# Altium PCB Orient.PcbDoc (part 4 of 4)
Units mil, origin at the board's own origin, x right, y up, seen from the top; angles counter-clockwise.
Board outline 3600 x 2400 mil, 4 copper layers (Top Layer, Layer 1, Layer 2, Bottom Layer), stack 23.756 mil thick; 365 components, 303 nets, 1656 pads, 303 vias.
Unrouted connection lines stored in the file: 1026.
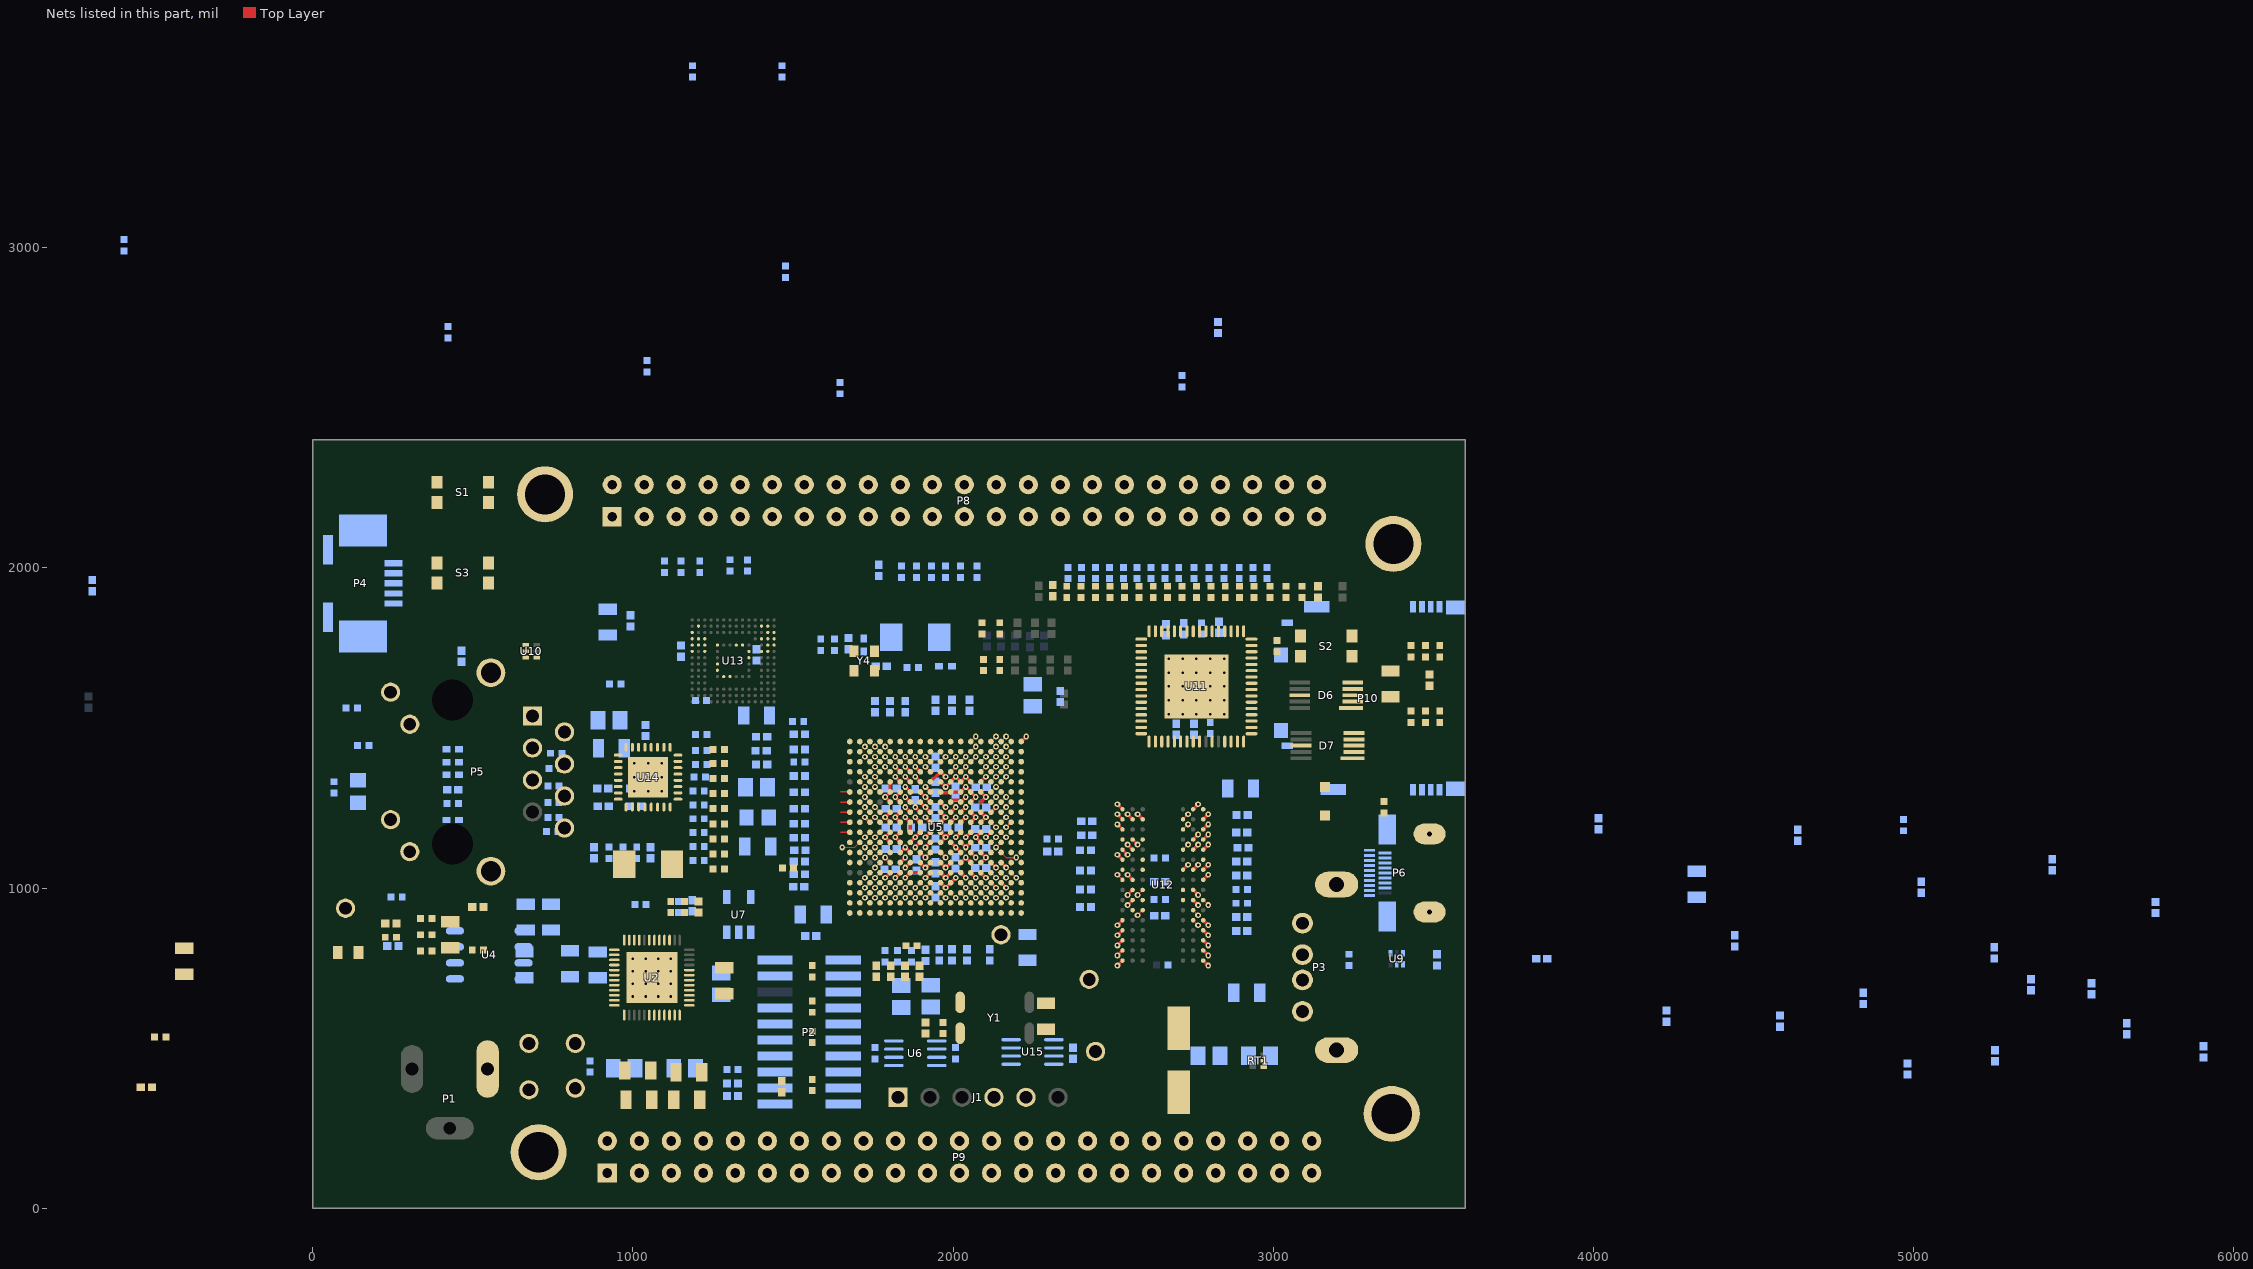
[diagram p4: the nets of this part, all layers, seen from the top]

## Part data (continued)
R97 R112 R113 R114 R119 R146 R147: library part RES_10k, "RES 1.50K OHM 1/16W 1% 0402 SMD", Manufacturer=Yageo, Manufacturer Part Number=RC0402FR-071K5L, Package / Case="0402 (1005 Metric)", Power (Watts)="0.063W, 1/16W", Resistance (Ohms)=1.5k, Supplier Device Package=0402, Supplier Part Number 1=311-1.50KLRDKR-ND, Temperature Coefficient=±100ppm/°C, Tolerance=±1%, Category=Resistors, ComponentLink1Description=http://www.yageo.com/documents/recent/PYu-RC0402_51_RoHS_L_6.pdf, ComponentLink1URL=http://www.yageo.com/documents/recent/PYu-RC0402_51_RoHS_L_6.pdf, Composition="Thick Film", Features=-, Height="0.016\" (0.40mm)", Number of Terminations=2, Packaging=Digi-Reel®, Pricing 1="1=0.1, 10=0.014, 25=0.0104, 100=0.0063, 250=0.0054, 500=0.00382, 1000=0.0027, 2500=0.00234, 5000=0.00203 (USD)", RoHS="RoHS Compliant", Size / Dimension="0.039\" L x 0.020\" W (1.00mm x 0.50mm)", Supplier 1=Digi-Key
  R97 R112 R113 R114: Stock 1=433921
  R119: Stock 1=465266
  R146 R147: Stock 1=434146
R99: library part RES_240, "RES 240 OHM 1/10W 5% 0402 SMD", Manufacturer=Yageo, Manufacturer Part Number=RC0402FR-07240RL, Package / Case="0402 (1005 Metric)", Power (Watts)="0.063W, 1/16W", Resistance (Ohms)=240, Supplier Device Package=0402, Supplier Part Number 1=311-240LRDKR-ND, Temperature Coefficient=±100ppm/°C, Tolerance=±1%, Category=Resistors, ComponentLink1Description=http://www.yageo.com/documents/recent/PYu-RC0402_51_RoHS_L_6.pdf, ComponentLink1URL=http://www.yageo.com/documents/recent/PYu-RC0402_51_RoHS_L_6.pdf, Composition="Thick Film", Features=-, Height="0.016\" (0.40mm)", Number of Terminations=2, Packaging=Digi-Reel®, Pricing 1="1=0.1, 10=0.014, 25=0.0104, 100=0.0063, 250=0.0054, 500=0.00382, 1000=0.0027, 2500=0.00234, 5000=0.00203 (USD)", RoHS="RoHS Compliant", Size / Dimension="0.039\" L x 0.020\" W (1.00mm x 0.50mm)", Stock 1=39100, Supplier 1=Digi-Key
R124: library part RES_10, "Resistor 10Kohm 1/16W 1% 0402", Manufacturer="Stackpole Electronics Inc", Manufacturer Part Number=RMCF0402FT10R0, Package / Case="0402 (1005 Metric)", Power (Watts)="0.063W, 1/16W", Resistance (Ohms)=10, Supplier Device Package=0402, Supplier Part Number 1=RMCF0402FT10R0DKR-ND, Temperature Coefficient=±100ppm/°C, Tolerance=±1%, Category=Resistors, ComponentLink1Description=http://www.seielect.com/Catalog/SEI-RMCF_RMCP.pdf, ComponentLink1URL=http://www.seielect.com/Catalog/SEI-RMCF_RMCP.pdf, Composition="Thick Film", Features=-, Height="0.016\" (0.40mm)", Number of Terminations=2, Packaging=Digi-Reel®, Pricing 1="1=0.04, 10=0.025, 50=0.0138, 100=0.0105, 250=0.0078, 500=0.00576, 1000=0.00384, 2500=0.00324, 5000=0.0027 (USD)", RoHS="RoHS Compliant", Size / Dimension="0.039\" L x 0.020\" W (1.00mm x 0.50mm)", Stock 1=41540, Supplier 1=Digi-Key
R125 R126 R129: library part RES_100, "RES 100 OHM 1/10W 5% 0402 SMD", Manufacturer="Panasonic Electronic Components", Manufacturer Part Number=ERJ-2RKF1000X, Package / Case="0402 (1005 Metric)", Power (Watts)="0.1W, 1/10W", Resistance (Ohms)=100, Supplier Device Package=0402, Supplier Part Number 1=P100LDKR-ND, Temperature Coefficient=±100ppm/°C, Category=Resistors, ComponentLink1Description=http://industrial.panasonic.com/www-cgi/jvcr13pz.cgi?E+PZ+3+AOA0002+ERJ2RKF1000X+7+WW, ComponentLink1URL=http://industrial.panasonic.com/www-cgi/jvcr13pz.cgi?E+PZ+3+AOA0002+ERJ2RKF1000X+7+WW, Composition="Thick Film", Features=-, Height="0.016\" (0.40mm)", Number of Terminations=2, Packaging=Digi-Reel®, PART#="Rohm MCR03EZPFX1000", Pricing 1="1=0.1, 50=0.0242, 100=0.0184, 250=0.01364, 500=0.01008, 1000=0.00672, 5000=0.00473 (USD)", RoHS=RoHS, Size / Dimension="0.039\" L x 0.020\" W (1.00mm x 0.50mm)", Stock 1=2375521, Supplier 1=Digi-Key
R127 R128 R131 R133 R139: library part RES_100, "RES 100 OHM 1/10W 5% 0402 SMD", Manufacturer="Panasonic Electronic Components", Manufacturer Part Number=ERJ-2RKF1000X, Package / Case="0402 (1005 Metric)", Power (Watts)="0.1W, 1/10W", Resistance (Ohms)=100, Supplier Device Package=0402, Supplier Part Number 1=P100LDKR-ND, Temperature Coefficient=±100ppm/°C, Tolerance=±1%, Category=Resistors, ComponentLink1Description=http://industrial.panasonic.com/www-cgi/jvcr13pz.cgi?E+PZ+3+AOA0002+ERJ2RKF1000X+7+WW, ComponentLink1URL=http://industrial.panasonic.com/www-cgi/jvcr13pz.cgi?E+PZ+3+AOA0002+ERJ2RKF1000X+7+WW, Composition="Thick Film", Features=-, Height="0.016\" (0.40mm)", Number of Terminations=2, Packaging=Digi-Reel®, Pricing 1="1=0.1, 50=0.0242, 100=0.0184, 250=0.01364, 500=0.01008, 1000=0.00672, 5000=0.00473 (USD)", RoHS="RoHS Compliant", Size / Dimension="0.039\" L x 0.020\" W (1.00mm x 0.50mm)", Stock 1=2375521, Supplier 1=Digi-Key
R130 R132: library part RES_470, "RES 470 OHM 1/10W 5% 0402 SMD", Manufacturer="Panasonic Electronic Components", Manufacturer Part Number=ERJ-2GEJ471X, Package / Case="0402 (1005 Metric)", Power (Watts)="0.1W, 1/10W", Resistance (Ohms)=470, Supplier Device Package=0402, Supplier Part Number 1=P470JDKR-ND, Temperature Coefficient=±200ppm/°C, Tolerance=±5%, Category=Resistors, ComponentLink1Description=http://industrial.panasonic.com/www-cgi/jvcr13pz.cgi?E+PZ+3+AOA0001+ERJ2GEJ471X+7+WW, ComponentLink1URL=http://industrial.panasonic.com/www-cgi/jvcr13pz.cgi?E+PZ+3+AOA0001+ERJ2GEJ471X+7+WW, Composition="Thick Film", Features=-, Height="0.016\" (0.40mm)", Number of Terminations=2, Packaging=Digi-Reel®, Pricing 1="1=0.1, 50=0.0172, 100=0.0131, 250=0.00976, 500=0.0072, 1000=0.0048, 5000=0.00338 (USD)", RoHS="RoHS Compliant", Size / Dimension="0.039\" L x 0.020\" W (1.00mm x 0.50mm)", Stock 1=563344, Supplier 1=Digi-Key
R134 R138: library part RES_100, "RES 100 OHM 1/10W 5% 0402 SMD", Manufacturer="Panasonic Electronic Components", Manufacturer Part Number=ERJ-2RKF1000X, Package / Case="0402 (1005 Metric)", Power (Watts)="0.1W, 1/10W", Resistance (Ohms)=100, Supplier Device Package=0402, Supplier Part Number 1=P100LDKR-ND, Temperature Coefficient=±100ppm/°C, Tolerance=1%, Category=Resistors, ComponentLink1Description=http://industrial.panasonic.com/www-cgi/jvcr13pz.cgi?E+PZ+3+AOA0002+ERJ2RKF1000X+7+WW, ComponentLink1URL=http://industrial.panasonic.com/www-cgi/jvcr13pz.cgi?E+PZ+3+AOA0002+ERJ2RKF1000X+7+WW, Composition="Thick Film", Features=-, Height="0.016\" (0.40mm)", Number of Terminations=2, Packaging=Digi-Reel®, PART#="Rohm MCR03EZPFX1000", Pricing 1="1=0.1, 50=0.0242, 100=0.0184, 250=0.01364, 500=0.01008, 1000=0.00672, 5000=0.00473 (USD)", RoHS=RoHS, Size / Dimension="0.039\" L x 0.020\" W (1.00mm x 0.50mm)", Stock 1=2375521, Supplier 1=Digi-Key, Wattage=1/10W
R136: library part RES_0.1_0805, "RES .10 OHM 1/8W 5% 0805", Manufacturer="CTS Resistor Products", Manufacturer Part Number=73L3R10J, Package / Case="0805 (2012 Metric)", Power (Watts)="0.125W, 1/8W", Resistance (Ohms)=0.1, Supplier Device Package=0805, Supplier Part Number 1=73L3R10JDKR-ND, Temperature Coefficient=±200ppm/°C, Tolerance=±5%, Category=Resistors, ComponentLink1Description=http://www.ctscorp.com/components/Datasheets/008-0337-0.pdf, ComponentLink1URL=http://www.ctscorp.com/components/Datasheets/008-0337-0.pdf, Composition="Thick Film", Features="Current Sense", Height="0.026\" (0.65mm)", Number of Terminations=2, Packaging=Digi-Reel®, Pricing 1="1=0.1, 10=0.066, 100=0.0267, 250=0.0204, 500=0.01632, 1000=0.01201 (USD)", RoHS="RoHS Compliant", Size / Dimension="0.079\" L x 0.049\" W (2.00mm x 1.25mm)", Stock 1=37057, Supplier 1=Digi-Key
R137 R140 R142 R149: library part RES_0, "RES 0.0 OHM 1/16W 0402 SMD", Manufacturer=Yageo, Manufacturer Part Number=RC0402JR-070RL, Package / Case="0402 (1005 Metric)", Power (Watts)="0.063W, 1/16W", Resistance (Ohms)=0.0, Supplier Device Package=0402, Supplier Part Number 1=311-0.0JRDKR-ND, Temperature Coefficient=-, Tolerance=Jumper, Category=Resistors, ComponentLink1Description=http://www.yageo.com/documents/recent/PYu-RC0402_51_RoHS_L_6.pdf, ComponentLink1URL=http://www.yageo.com/documents/recent/PYu-RC0402_51_RoHS_L_6.pdf, Composition="Thick Film", Features=-, Height="0.016\" (0.40mm)", Number of Terminations=2, Packaging=Digi-Reel®, Pricing 1="1=0.1, 10=0.012, 25=0.0092, 100=0.0055, 250=0.00476, 500=0.00336, 1000=0.00237, 2500=0.00206, 5000=0.00178 (USD)", RoHS="RoHS Compliant", Size / Dimension="0.039\" L x 0.020\" W (1.00mm x 0.50mm)", Supplier 1=Digi-Key
  R137 R140 R142: Stock 1=4904429
  R149: Stock 1=4565215
R141: library part RES_1M, "RES 1M OHM 1/16W 1% 0402 SMD", Manufacturer="Stackpole Electronics Inc", Manufacturer Part Number=RMCF0402FT1M00, Package / Case="0402 (1005 Metric)", Power (Watts)="0.063W, 1/16W", Resistance (Ohms)=1M, Supplier Device Package=0402, Supplier Part Number 1=RMCF0402FT1M00DKR-ND, Temperature Coefficient=±100ppm/°C, Tolerance=±1%, Category=Resistors, ComponentLink1Description=http://www.seielect.com/Catalog/SEI-RMCF_RMCP.pdf, ComponentLink1URL=http://www.seielect.com/Catalog/SEI-RMCF_RMCP.pdf, Composition="Thick Film", Features=-, Height="0.016\" (0.40mm)", Number of Terminations=2, Packaging=Digi-Reel®, Pricing 1="1=0.04, 10=0.025, 50=0.0138, 100=0.0105, 250=0.0078, 500=0.00576, 1000=0.00384, 2500=0.00324, 5000=0.0027 (USD)", RoHS="RoHS Compliant", Size / Dimension="0.039\" L x 0.020\" W (1.00mm x 0.50mm)", Stock 1=175650, Supplier 1=Digi-Key
R143: library part RES_10, "RES 10 OHM 1/16W 1% 0402 SMD", Manufacturer="Stackpole Electronics Inc", Manufacturer Part Number=RMCF0402FT10R0, Package / Case="0402 (1005 Metric)", Power (Watts)="0.063W, 1/16W", Resistance (Ohms)=10, Supplier Device Package=0402, Supplier Part Number 1=RMCF0402FT10R0DKR-ND, Temperature Coefficient=±100ppm/°C, Tolerance=±1%, Category=Resistors, ComponentLink1Description=http://www.seielect.com/Catalog/SEI-RMCF_RMCP.pdf, ComponentLink1URL=http://www.seielect.com/Catalog/SEI-RMCF_RMCP.pdf, Composition="Thick Film", Features=-, Height="0.016\" (0.40mm)", Number of Terminations=2, Packaging=Digi-Reel®, Pricing 1="1=0.04, 10=0.025, 50=0.0138, 100=0.0105, 250=0.0078, 500=0.00576, 1000=0.00384, 2500=0.00324, 5000=0.0027 (USD)", RoHS="RoHS Compliant", Size / Dimension="0.039\" L x 0.020\" W (1.00mm x 0.50mm)", Stock 1=41540, Supplier 1=Digi-Key
R144: library part RES_12.1k, "RES 12.1K OHM 1/16W 1% 0402 SMD", Manufacturer=Yageo, Manufacturer Part Number=RC0402FR-0712K1L, Package / Case="0402 (1005 Metric)", Power (Watts)="0.063W, 1/16W", Resistance (Ohms)=12.1k, Supplier Device Package=0402, Supplier Part Number 1=311-12.1KLRDKR-ND, Temperature Coefficient=±100ppm/°C, Tolerance=±1%, Category=Resistors, ComponentLink1Description=http://www.yageo.com/documents/recent/PYu-RC0402_51_RoHS_L_6.pdf, ComponentLink1URL=http://www.yageo.com/documents/recent/PYu-RC0402_51_RoHS_L_6.pdf, Composition="Thick Film", Features=-, Height="0.016\" (0.40mm)", Number of Terminations=2, Packaging=Digi-Reel®, Pricing 1="1=0.1, 10=0.014, 25=0.0104, 100=0.0063, 250=0.0054, 500=0.00382, 1000=0.0027, 2500=0.00234, 5000=0.00203 (USD)", RoHS="RoHS Compliant", Size / Dimension="0.039\" L x 0.020\" W (1.00mm x 0.50mm)", Stock 1=320170, Supplier 1=Digi-Key
R166: library part RES_27k, "RES 27.0K OHM 1/16W 1% 0402 SMD", Manufacturer=Yageo, Manufacturer Part Number=RC0402FR-0727KL, Package / Case="0402 (1005 Metric)", Power (Watts)="0.063W, 1/16W", Resistance (Ohms)=27k, Supplier Device Package=0402, Supplier Part Number 1=311-27.0KLRDKR-ND, Temperature Coefficient=±100ppm/°C, Tolerance=±1%, Category=Resistors, ComponentLink1Description=http://www.yageo.com/documents/recent/PYu-RC0402_51_RoHS_L_6.pdf, ComponentLink1URL=http://www.yageo.com/documents/recent/PYu-RC0402_51_RoHS_L_6.pdf, Composition="Thick Film", Features=-, Height="0.016\" (0.40mm)", Number of Terminations=2, Packaging=Digi-Reel®, Pricing 1="1=0.1, 10=0.014, 25=0.0104, 100=0.0063, 250=0.0054, 500=0.00382, 1000=0.0027, 2500=0.00234, 5000=0.00203 (USD)", RoHS="RoHS Compliant", Size / Dimension="0.039\" L x 0.020\" W (1.00mm x 0.50mm)", Stock 1=115508, Supplier 1=Digi-Key
R167: library part RES_33_0402, "RES 33 OHM 1/16W 5% 0402 SMD", Manufacturer="Panasonic Electronic Components", Manufacturer Part Number=ERJ-2GEJ330X, Package / Case="0402 (1005 Metric)", Power (Watts)="0.1W, 1/10W", Resistance (Ohms)=33, Supplier Device Package=0402, Supplier Part Number 1=P33JDKR-ND, Temperature Coefficient=±200ppm/°C, Tolerance=±5%, Category=Resistors, ComponentLink1Description=http://industrial.panasonic.com/www-cgi/jvcr13pz.cgi?E+PZ+3+AOA0001+ERJ2GEJ330X+7+WW, ComponentLink1URL=http://industrial.panasonic.com/www-cgi/jvcr13pz.cgi?E+PZ+3+AOA0001+ERJ2GEJ330X+7+WW, Composition="Thick Film", Features=-, Height="0.016\" (0.40mm)", Number of Terminations=2, Packaging=Digi-Reel®, Pricing 1="1=0.1, 50=0.0172, 100=0.0131, 250=0.00976, 500=0.0072, 1000=0.0048, 5000=0.00338 (USD)", RoHS="RoHS Compliant", Size / Dimension="0.039\" L x 0.020\" W (1.00mm x 0.50mm)", Stock 1=5879945, Supplier 1=Digi-Key
RT1: library part PROT_TPD4S012, "POLYSWITCH PTC RESET 0.1A", Current - Hold (Ih) (Max)=100mA, Current - Max=40A, Current - Trip (It)=200mA, Manufacturer="TE Connectivity", Manufacturer Part Number=RXEF010, Package / Case="Radial, Disc", Supplier Part Number 1=RXEF010-ND, Voltage - Max=60V, Category="Circuit Protection", ComponentLink1Description=http://documents.tycoelectronics.com/commerce/DocumentDelivery/DDEController?Action=showdoc&DocId=Specification+Or+Standard%7FSCD25213%7FE%7Fpdf%7FEnglish%7FENG_SS_SCD25213_E.pdf, ComponentLink1URL=http://documents.tycoelectronics.com/commerce/DocumentDelivery/DDEController?Action=showdoc&DocId=Specification+Or+Standard%7FSCD25213%7FE%7Fpdf%7FEnglish%7FENG_SS_SCD25213_E.pdf, Packaging=Bulk, Pricing 1="1=0.32, 10=0.289, 100=0.2625, 500=0.20476, 1000=0.1764, 5000=0.1617, 10000=0.1365, 50000=0.13125, 100000=0.126 (USD)", R Min/Max="2.500 ~ 4.500 Ohm", RoHS="RoHS Compliant", Stock 1=22325, Supplier 1=Digi-Key, Time to Trip=4s
S1 S2 S3: library part KMR2, "Microminiature Tact Switch for SMT", Contact Rating @ Voltage="0.05A @ 32VDC", Illumination Type, Color=-, Manufacturer="C&K Components", Operating Force=300gf, Operating Temperature="-40°C ~ 85°C", Supplier Part Number 1=401-1429-6-ND, Actuator Height off PCB, from Pins=1.90mm, Actuator Material=-, Actuator Orientation="Top Actuated", Actuator Type=Standard, Category=Switches, Circuit=SPST-NO, ComponentLink1Description=http://www.ck-components.com/index.php?module=media&action=Display&cmpref=14414&lang=en&width=&height=&format=&alt=, ComponentLink1URL=http://www.ck-components.com/index.php?module=media&action=Display&cmpref=14414&lang=en&width=&height=&format=&alt=, Features="Grounding Pin", Illumination=Non-Illuminated, Illumination Voltage (Nominal)=-, Ingress Protection=-, Manufacturer Part Number=KMR231GLFS, Mechanical Life="150,000 Cycles", Mounting Type="Surface Mount", Outline="4.60mm x 2.80mm", Packaging=Digi-Reel®, Pricing 1="1=0.44, 10=0.416, 25=0.3744, 50=0.3326, 100=0.3188, 250=0.29108, 500=0.2772, 1000=0.22869 (USD)", RoHS="RoHS Compliant", Stock 1=32289, Supplier 1=Digi-Key, Switch Function=Off-Mom, Switch Travel=0.25mm, Termination Style="Gull Wing"
U2: "IC PMIC BATT PWR SYST 48VQFN", Current - Supply=-, Manufacturer="Texas Instruments", Manufacturer Part Number=TPS65217CRSLR, Operating Temperature="-40°C ~ 105°C", Package / Case="48-VFQFN Exposed Pad", Supplier Device Package="48-VQFN-EP (6x6)", Supplier Part Number 1=296-34814-6-ND, Voltage - Supply="2.75 V ~ 5.8 V", Applications="Battery Management, Display (LED Drivers), Handheld/Mobile Devices, Power Supply", Category="Integrated Circuits (ICs)", ComponentLink1Description=Datasheet, ComponentLink1URL=http://www.ti.com/lit/ds/slvsb64i/slvsb64i.pdf, Mounting Type="Surface Mount", Packaging=Digi-Reel®, Pricing 1="1=8.01, 10=7.204, 25=6.5516, 100=4.1918, 250=4.11412, 500=4.0365, 750=3.95888 (USD)", RoHS="RoHS Compliant", Stock 1=0, Supplier 1=Digi-Key
U4: "LDO Voltage Regulator", Current - Limit (Min)=-, Current - Output="500mA (Max)", Manufacturer="Texas Instruments", Manufacturer Part Number=TL5209DR, Operating Temperature="-40°C ~ 125°C", Package / Case="8-SOIC (0.154\", 3.90mm Width)", Supplier Device Package=8-SOIC, Supplier Part Number 1=296-21569-6-ND, Voltage - Dropout (Typical)="0.35V @ 500mA", Voltage - Input="2.5 V ~ 16 V", Voltage - Output="2.5 V ~ 6.5 V", Category="Integrated Circuits (ICs)", ComponentLink1Description=http://media.digikey.com/pdf/Data%20Sheets/Texas%20Instruments%20PDFs/TL5209.pdf, ComponentLink1URL=http://media.digikey.com/pdf/Data%20Sheets/Texas%20Instruments%20PDFs/TL5209.pdf, Mounting Type="Surface Mount", Number of Regulators=1, Packaging=Digi-Reel®, Pricing 1="1=1.41, 10=1.244, 25=1.1232, 100=0.9828, 250=0.86192, 500=0.7644, 1000=0.6045 (USD)", Regulator Topology="Positive Adjustable", RoHS="RoHS Compliant", Stock 1=7190, Supplier 1=Digi-Key
U5: "SubArctic Cortex A8 Processor 15x15", Manufacturer="Texas Instruments", Manufacturer Part Number=XAM3359ZCZ, Package / Case=324-LFBGA, Supplier Device Package=324-NFBGA(15x15), Supplier Part Number 1=296-35073-ND, Voltage="1.06 V ~ 1.15 V", Category="Integrated Circuits (ICs)", ComponentLink1Description=http://www.ti.com/lit/ds/symlink/am3354.pdf, ComponentLink1URL=http://www.ti.com/lit/ds/symlink/am3354.pdf, Features=-, Mounting Type="Surface Mount", Packaging=Tray, Pricing 1="1=33.5, 10=30.988, 100=26.465, 250=24.28752, 500=23.115, 1000=21.775, 2500=21.105, 5000=20.6025, 10000=20.1 (USD)", Processor Type="ARM Microprocessor", RoHS="RoHS Compliant", Speed=-, Stock 1=16, Supplier 1=Digi-Key
U6: "SINGLE  POSITIVE-EDGE-TRIGGERED  D-TYPE  FLIP-FLOP WITH  CLEAR  AND  PRESET", Current - Output High, Low="32mA, 32mA", Frequency - Clock=200MHz, Manufacturer="Texas Instruments", Operating Temperature="-40°C ~ 125°C", Package / Case="8-LSSOP (0.11\", 2.80mm Width)", Supplier Part Number 1=296-25553-6-ND, Voltage - Supply="1.65 V ~ 5.5 V", Category="Integrated Circuits (ICs)", ComponentLink1Description=http://media.digikey.com/pdf/Data%20Sheets/Texas%20Instruments%20PDFs/SN74LVC1G74.pdf, ComponentLink1URL=http://media.digikey.com/pdf/Data%20Sheets/Texas%20Instruments%20PDFs/SN74LVC1G74.pdf, Delay Time - Propagation=1.6ns, Function="Set(Preset) and Reset", Manufacturer Part Number=SN74LVC1G74DCTR, Mounting Type="Surface Mount", Number of Bits per Element=1, Number of Elements=1, Output Type=Differential, Packaging=Digi-Reel®, Pricing 1="1=0.59, 10=0.494, 25=0.4332, 100=0.3708, 250=0.3216, 500=0.2724, 1000=0.21 (USD)", RoHS="RoHS Compliant", Stock 1=131, Supplier 1=Digi-Key, Trigger Type="Positive Edge", Type=D-Type
U7: "IC EEPROM 32KBIT 400KHZ SOT23-5", Manufacturer="Microchip Technology", Manufacturer Part Number=24LC32AT-I/OT, Operating Temperature="-40°C ~ 85°C", Package / Case="SC-74A, SOT-753", Supplier Device Package=SOT-23-5, Supplier Part Number 1=24LC32AT-I/OTDKR-ND, Voltage - Supply="2.5 V ~ 5.5 V", Category="Integrated Circuits (ICs)", ComponentLink1Description=http://ww1.microchip.com/downloads/en/DeviceDoc/21713M.pdf, ComponentLink1URL=http://ww1.microchip.com/downloads/en/DeviceDoc/21713M.pdf, Format - Memory="EEPROMs - Serial", Interface="I²C, 2-Wire Serial", Memory Size="32K (4K x 8)", Memory Type=EEPROM, Packaging=Digi-Reel®, Pricing 1="1=0.5, 10=0.32, 25=0.31, 100=0.3 (USD)", RoHS="RoHS Compliant", Speed=400kHz, Stock 1=8694, Supplier 1=Digi-Key
U9 U10: library part PROT_TPD4S012, "ESD 4channel USB Interface", Manufacturer="Texas Instruments", Manufacturer Part Number=TPD4S012DRYR, Mfr=TI, MfrNum=TPD4S012DRY, Package / Case=6-UFDFN, Power (Watts)=60W, Supplier Device Package="6-SON (1.45x1)", Supplier Part Number 1=296-24244-6-ND, TIIntPartnumber=1A0233, Voltage - Clamping=-, Applications=USB, Category="Circuit Protection", ComponentLink1Description=http://www.ti.com/lit/ds/symlink/tpd4s012.pdf, ComponentLink1URL=http://www.ti.com/lit/ds/symlink/tpd4s012.pdf, Cost10K=0.23, Cost100=0.76, Number of Circuits=4, Packaging=Digi-Reel®, PartName=TPD4S012, Pricing 1="1=0.78, 10=0.682, 25=0.6028, 100=0.2552, 250=0.25044, 500=0.2457, 750=0.24097 (USD)", RoHS="RoHS Compliant", Stock 1=7978, Supplier 1=Digi-Key, Technology="Mixed Technology", Vendor=Digikey, Voltage - Working=-
U11: "IC HDMI TRANSMITTER 64-HVQFN", Manufacturer="NXP Semiconductors", Manufacturer Part Number=TDA19988AHN/C1,551, Package / Case="64-VFQFN Exposed Pad", Supplier Device Package="64-HVQFN (9x9)", Supplier Part Number 1=TDA19988AHN/C1,551-ND, Applications="Set-Top Boxes", Category="Integrated Circuits (ICs)", ComponentLink1Description=Digikey, ComponentLink1URL=https://www.digikey.com/product-detail/en/nxp-usa-inc/TDA19988BHN-C1557/568-12059-ND/2780352, ComponentLink2Description=Datasheet, ComponentLink2URL=https://media.digikey.com/pdf/Data%20Sheets/NXP%20PDFs/TDA19988_DS_21_july_2011.pdf, Mounting Type="Surface Mount", Packaging=Tray, Pricing 1="260=4.59 (USD)", RoHS="RoHS Compliant", Stock 1=0, Supplier 1=Digi-Key, Type="HDMI Transmitter"
U12: library part MT41K256M16HA, "DDR2 SDRAM 2Gb (256Mx8)", Manufacturer="Micron Technology", Manufacturer Part Number=MT41K256M16HA-125:E, Package Quantity=1, Peak Solder Temperature="260 deg C", Supplier Part Number 1=52128708S9959891N2406, China ROHS Cadmium (X -> above / O -> below threshold)=O, China ROHS Hex Chromium (X -> above / O -> below threshold)=O, China ROHS Lead (X -> above / O -> below threshold)=O, China ROHS Mercury (X -> above / O -> below threshold)=O, China ROHS PBB (X -> above / O -> below threshold)=O, China ROHS PBDE (X -> above / O -> below threshold)=O, ComponentLink1Description=http://components.arrow.com/partservice/dataview/altium/52128708S9959891N2406?apiKey=aa438727d59eed98c4bed826d8d949c84cb5e685b92bf87346a0226bd2658797, ComponentLink1URL=http://components.arrow.com/partservice/dataview/altium/52128708S9959891N2406?apiKey=aa438727d59eed98c4bed826d8d949c84cb5e685b92bf87346a0226bd2658797, EU_ROHS_PROD_EXEMPTION_BY_SUPP=N/R, Lead Time="0 weeks", Pricing 1="0=10.09 (USD)", RoHS="CHINA ROHS: Compliant / EU ROHS: Compliant", Stock 1=0, Supplier 1=Arrow, Termination Finish=Sn/Ag/Cu
U13: library part IC_eMMC, "Flash Card 2G-byte 3.3V MultiMedia Card 153-Pin WFBGA", Manufacturer="Micron Technology", Manufacturer Part Number="MTFC2GMVEA-0M WT", Package Quantity=1, Supplier Part Number 1=53710993S251949N2406, ComponentLink1Description=http://components.arrow.com/partservice/dataview/altium/53710993S251949N2406?apiKey=aa438727d59eed98c4bed826d8d949c84cb5e685b92bf87346a0226bd2658797, ComponentLink1URL=http://components.arrow.com/partservice/dataview/altium/53710993S251949N2406?apiKey=aa438727d59eed98c4bed826d8d949c84cb5e685b92bf87346a0226bd2658797, EU_ROHS_PROD_EXEMPTION_BY_SUPP=N/R, Lead Time="2 weeks", Pricing 1="0=7.21 (USD)", RoHS="CHINA ROHS: Compliant / EU ROHS: Compliant", Stock 1=1009, Supplier 1=Arrow
U14: library part IC_Ethernet_XCVR, "Ethernet ICs 10/100 Ethernet XCVR w/HPAutoMDIX FlexPwr", Manufacturer="Microchip Technology", Manufacturer Part Number=LAN8710A-EZK-TR, Maximum Operating Temperature="+ 85 C", Minimum Operating Temperature="0 C", Package / Case=QFN-32, Supplier Part Number 1=886-LAN8710A-EZK-TR, Supply Voltage - Max="3.6 V", Supply Voltage - Min="1.6 V, 3 V", Category="Ethernet ICs", ComponentLink1Description=http://www.smsc.com/media/Downloads_Public/Data_Sheets/8710a.pdf, ComponentLink1URL=http://www.smsc.com/media/Downloads_Public/Data_Sheets/8710a.pdf, Data Rate="125 Mb/s", Minimum Order Quantity=1, Mounting Style=SMD/SMT, Number of Transceivers=1, Packaging=Reel, PART#="SMSC LAN8710A-EZK", Pricing 1="1=1.70, 10=1.47, 25=1.23, 100=1.11, 4000=1.11 (AUD)", Product="Ethernet Transceivers", Product Category="Ethernet Controllers", Reeling=True, RoHS="RoHS Compliant", RoHS - Mouser=Y, Standard Supported="802.3, 802.3u", Stock 1=12109, Supplier 1=Mouser, Type="Single Chip"
U15: "IC BUFF/DVR TRI-ST DL 8VSSOP", Current - Output High, Low="32mA, 32mA", Manufacturer="Texas Instruments", Manufacturer Part Number=SN74LVC2G241DCUR, Operating Temperature="-40°C ~ 85°C", Package / Case="8-VFSOP (0.091\", 2.30mm Width)", Supplier Device Package=US8, Supplier Part Number 1=296-11936-6-ND, Voltage - Supply="1.65 V ~ 5.5 V", Category="Integrated Circuits (ICs)", ComponentLink1Description=http://www.ti.com/lit/ds/symlink/sn74lvc2g241.pdf, ComponentLink1URL=http://www.ti.com/lit/ds/symlink/sn74lvc2g241.pdf, Logic Type="Buffer/Line Driver, Non-Inverting", Mounting Type="Surface Mount", Number of Bits per Element=1, Number of Elements=2, Packaging=Digi-Reel®, Pricing 1="1=0.49, 10=0.428, 25=0.3756 (USD)", RoHS="RoHS Compliant", Stock 1=28602, Supplier 1=Digi-Key
Y1: library part CRYS_32.768kHz, "CRYSTAL 32.768KHZ 12.5PF SMD", ESR (Equivalent Series Resistance)="50 kOhm", Frequency Stability=-, Frequency Tolerance=±30ppm, Load Capacitance=12.5pF, Manufacturer="Citizen Finetech Miyota", Manufacturer Part Number=CM200C-32.768KAZF-UT, Operating Mode=Fundamental, Operating Temperature="-40°C ~ 85°C", Package / Case="4-SOJ, 5.50mm pitch", Supplier Part Number 1=300-8738-6-ND, Category="Crystals and Oscillators", ComponentLink1Description=http://cfm.citizen.co.jp/english/product/pdf/CM200C_250C.pdf, ComponentLink1URL=http://cfm.citizen.co.jp/english/product/pdf/CM200C_250C.pdf, Frequency=32.768kHz, Height="0.098\" (2.50mm)", Mounting Type="Surface Mount", Packaging=Digi-Reel®, Pricing 1="1=0.75, 10=0.65, 50=0.57, 100=0.45, 500=0.38, 1000=0.3 (USD)", Ratings=-, RoHS="RoHS Compliant", Size / Dimension="0.311\" L x 0.146\" W (7.90mm x 3.70mm)", Stock 1=0, Supplier 1=Digi-Key, Type="kHz Crystal (Tuning Fork)"
Y2: library part CRYS_24MHz_SCC, "CRYSTAL 24.000MHZ 18PF SMD", ESR (Equivalent Series Resistance)="50 Ohm", Frequency Stability=±30ppm, Load Capacitance=18pF, Manufacturer="TXC CORPORATION", Manufacturer Part Number=7A-24.000MAAJ-T, Operating Mode=Fundamental, Operating Temperature="-20°C ~ 70°C", Package / Case=2-SMD, Ratings=-, Supplier Part Number 1=887-1090-6-ND, Category="Crystals and Oscillators", ComponentLink1Description=http://www.txccrystal.com/images/pdf/7a.pdf, ComponentLink1URL=http://www.txccrystal.com/images/pdf/7a.pdf, Frequency=24MHz, Frequency Tolerance=±30ppm, Height="0.053\" (1.35mm)", Mounting Type="Surface Mount", Packaging=Digi-Reel®, Pricing 1="1=0.79, 10=0.658, 50=0.59, 100=0.525, 500=0.5 (USD)", RoHS="RoHS Compliant", Size / Dimension="0.197\" L x 0.126\" W (5.00mm x 3.20mm)", Stock 1=2524, Supplier 1=Digi-Key, Type="MHz Crystal"
Y3: library part "Suntsu ITEMP 25MHz _0.005% 20pf", ESR (Equivalent Series Resistance)="50 Ohm", Frequency=25MHz, Frequency Stability=±50ppm, Frequency Tolerance=±20ppm, Load Capacitance=18pF, Manufacturer="Abracon Corporation", Manufacturer Part Number=ABM3-25.000MHZ-B2-T, Operating Mode=Fundamental, Operating Temperature="-20°C ~ 70°C", Package / Case=2-SMD, Ratings=-, Supplier Part Number 1=535-9108-6-ND, Category="Crystals and Oscillators", ComponentLink1Description=http://www.abracon.com/Resonators/abm3.pdf, ComponentLink1URL=http://www.abracon.com/Resonators/abm3.pdf, Height="0.051\" (1.30mm)", Mounting Type="Surface Mount", Packaging=Digi-Reel®, Pricing 1="1=1.43, 10=1.235, 50=1.083, 100=0.855, 500=0.722 (USD)", RoHS="RoHS Compliant", Size / Dimension="0.197\" L x 0.126\" W (5.00mm x 3.20mm)", Stock 1=23589, Supplier 1=Digi-Key, Type="MHz Crystal"
Y4: library part ASDMB, Current - Supply (Disable) (Max)=15µA, Current - Supply (Max)=16mA, Frequency Stability=±50ppm, Manufacturer="Abracon Corporation", Manufacturer Part Number=ASDMB-24.576MHZ-LC-T, Operating Temperature="-40°C ~ 85°C", Package / Case="4-SMD, No Lead (DFN, LCC)", Ratings=-, Supplier Part Number 1=535-11729-6-ND, Voltage - Supply="1.8 V ~ 3.3 V", Category="Crystals and Oscillators", ComponentLink1Description=http://www.abracon.com/Oscillators/ASDMB.pdf, ComponentLink1URL=http://www.abracon.com/Oscillators/ASDMB.pdf, Frequency=24.576MHz, Function="Standby (Power Down)", Height="0.035\" (0.90mm)", Mounting Type="Surface Mount", Output=CMOS, Packaging=Digi-Reel®, Pricing 1="1=1.69, 10=1.463, 50=1.2826, 100=1.0125, 500=0.855 (USD)", RoHS="RoHS Compliant", Size / Dimension="0.098\" L x 0.079\" W (2.50mm x 2.00mm)", Stock 1=0, Supplier 1=Digi-Key, Type="MEMS (Silicon)"

## Via types
v1: diameter 18, hole 8, Top Layer to Bottom Layer, tented both sides, 253 vias
v2: diameter 19.68, hole 7.87, Top Layer to Bottom Layer, 50 vias

## Nets (pads, with @x,y where several pads share a name; then routed paths per layer and width w, separated by ;. In a path a pad name is that pad's centre, name@x,y a point inside that pad or via, vN(x,y) a via of type N, cw(c..) or ccw(c..) an arc to the next point about the centre after c; other vN are vias at no path point)
12M_LOOP: U6.2 U6.3
12MHZ: R21.2 U11.27
AIN0: P9.39 U5.B6
AIN1: P9.40 U5.C7
  other v1: 2039.49,969.53
AIN2: P9.37 U5.B7
AIN3: P9.38 U5.A7
AIN4: P9.33 U5.C8
  other v1: 2007.99,969.53
AIN5: P9.36 U5.B8
AIN6: P9.35 U5.A8
AIN7: R163.2 R164.1 U5.C9
  other v1: 1976.5,969.53
B_UART0_RX: J1.4 R165.2 U15.2
B_UART0_TX: J1.5 U15.3
CAP_VBB_MPU: C91.1 U5.C10
  other v1: 1913.5,969.53
CAP_VDD_SRAM_CORE: C89.1 U5.D9
CAP_VDD_SRAM_MPU: C90.1 U5.D11
  other v1: 1882.01,1001.02
CLKOUT2: P2.18 P9.41 R19.2 R20.1
CLKOUT_SRC: R19.1 U5.D14
  other v1: 1787.52,1001.02
CRS: R139.2 U14.14
DDR_A0: U5.F3
  other v1: 2165.47,1064.02
DDR_A1: U5.H1
DDR_A2: U5.E4
  other v1: 2133.98,1032.52
DDR_A3: U5.C3
  other v1: 2165.47,969.53
DDR_A4: U5.C2
DDR_A5: U5.B1
DDR_A6: U5.D5
  other v1: 2102.48,1001.02
DDR_A7: U5.E2
  other v1: 2196.97,1032.52
DDR_A8: U5.D4
  other v1: 2133.98,1001.02
DDR_A9: U5.C1
DDR_A10: U5.F4
  other v1: 2133.98,1064.02
DDR_A11: U5.F2
DDR_A12: U5.E3
  other v1: 2165.47,1032.52
DDR_A13: U5.H3
  other v1: 2133.98,1127.01
DDR_A14: U5.H4
  other v1: 2133.98,1158.5
DDR_A15: U5.D3
  other v1: 2165.47,1001.02
DDR_BA0: U5.C4
  other v1: 2133.98,969.53
DDR_BA1: U5.E1
DDR_BA2: U5.B3
DDR_CASn: U5.F1 U12.K3
DDR_CKE: R96.2 U5.G3 U12.K9
  other v1: 2796.75,947 2196.97,1095.51
DDR_CLK: U5.D2 U12.J7
DDR_CLKn: U5.D1 U12.K7
DDR_CSn: U5.H2 U12.L2
DDR_D0: U5.M3
  other v1: 2165.47,1284.49
DDR_D1: U5.M4
  other v1: 2133.98,1284.49
DDR_D2: U5.N1
DDR_D3: U5.N2
DDR_D4: U5.N3
DDR_D5: U5.N4
  other v1: 2133.98,1315.98
DDR_D6: U5.P3
  other v1: 2165.47,1347.48
DDR_D7: U5.P4
  other v1: 2133.98,1347.48
DDR_D8: U5.J1
DDR_D9: U5.K1
DDR_D10: U5.K2
  other v1: 2165.47,1190
DDR_D11: U5.K3
  other v1: 2165.47,1221.5
DDR_D12: U5.K4
  other v1: 2133.98,1190
DDR_D13: U5.L3
  other v1: 2165.47,1252.99
DDR_D14: U5.L4
  other v1: 2133.98,1252.99
DDR_D15: U5.M1
DDR_DQM0: U5.M2 U12.E7
  other v1: 2733.75,1136
DDR_DQM1: U5.J2 U12.D3
DDR_DQS0: U5.P1 U12.F3
DDR_DQS1: U5.L1 U12.C7
  other v1: 2733.75,1199
DDR_DQSN0: U5.P2 U12.G3
DDR_DQSN1: U5.L2 U12.B7
  other v1: 2733.75,1230.5
DDR_ODT: U5.G1
DDR_RASn: U5.G4 U12.J3
  other v1: 2576.25,978.5
DDR_RESETn: U5.G2
DDR_VREF: C28.1 C123.1 C124.1 R98.2 R100.1 U5.J4 U12.H1 U12.M8
  other v1: 2765.25,884 2513.25,1041.5 2102.48,1158.5
DDR_VTP: R22.2 U5.J3
  other v1: 2165.47,1158.5
DDR_WEn: U5.B2 U12.L3
  other v1: 2576.25,915.5
DGND: C1.2 C2.2 C3.2 C4.2 C7.2 C8.2 C9.1 C10.2 C11.1 C12.1 C13.2 C14.1 C15.1 C16.1 C17.2 C18.1 C19.2 C20.2 C24.2 C27.2 C28.2 C29.2 C30.2 C35.2 C36.2 C37.2 C38.2 C39.1 C40.1 C41.2 C42.2 C43.2 C44.2 C45.2 C46.2 C47.2 C48.2 C49.2 C50.2 C51.2 C52.2 C53.2 C54.2 C55.1 C56.1 C57.1 C58.2 C59.2 C60.1 C61.1 C62.1 C63.2 C64.2 C65.2 C66.2 C67.2 C68.1 C69.1 C70.1 C71.1 C72.1 C73.1 C74.1 C75.1 C76.1 C77.2 C78.2 C79.2 C80.2 C81.2 C82.2 C83.2 C84.2 C85.2 C86.2 C87.2 C88.2 C89.2 C90.2 C91.2 C92.2 C94.2 C95.1 C96.1 C97.2 C98.2 C99.2 C100.2 C101.2 C102.2 C103.2 C104.2 C105.2 C106.2 C107.2 C108.2 C109.2 C110.2 C111.2 C112.2 C113.2 C114.2 C115.2 C116.2 C117.2 C118.1 C119.2 C120.2 C121.2 C122.1 C123.2 C124.2 C125.2 C126.1 C127.2 C128.2 C129.2 C130.2 C131.2 C132.2 C133.1 C134.2 C135.2 C136.2 C137.2 C138.2 C139.2 C140.2 C141.2 C142.2 C143.2 C144.2 C145.2 C146.2 C147.2 C148.2 C149.2 C150.2 C151.2 C152.2 C153.2 C154.2 C158.1 C159.2 D6.3 D6.8 D7.3 D7.8 FB3.2 J1.1 P2.4 P2.8 P2.10 P2.12 P2.16 P2.20 P3.4 P4.5 P5.8 P6.4 P6.7 P6.10 P6.13 P6.16 P8.1 P8.2 P9.1 P9.2 P9.43 P9.44 P9.45 P9.46 P10.6 P10.9 R10.1 R12.2 R22.1 R25.2 R49.1 R53.2 R54.1 R80.2 R81.2 R82.2 R83.2 R84.2 R85.2 R86.2 R87.2 R88.2 R89.2 R90.2 R91.2 R92.2 R93.2 R94.2 R95.2 R96.1 R99.1 R100.2 R115.2 R116.2 R117.2 R118.2 R130.1 R132.1 R135.2 R136.1 R144.2 R145.2 R148.2 R149.2 R164.2 R165.1 S1.1 S1.3 S2.2 S2.4 S3.1 S3.3 TP1.1 TP8.1 U2.30 U2.41 U2.49 U4.5 U4.6 U4.7 U4.8 U5.A1 U5.A18 U5.F8 U5.G8 U5.G9 U5.G11 U5.G12 U5.H6 U5.H7 U5.H8 U5.H9 U5.H10 U5.H12 U5.J6 U5.J7 U5.J8 U5.J9 U5.J10 U5.J11 U5.K7 U5.K9 U5.K10 U5.K11 U5.L10 U5.L11 U5.L12 U5.L13 U5.M6 U5.M7 U5.M8 U5.M9 U5.M10 U5.M12 U5.M14 U5.N7 U5.N10 U5.N11 U5.N14 U5.V1 U5.V18 U6.4 U7.2 U9.4 U10.4 U11.8 U11.9 U11.16 U11.17 U11.18 U11.19 U11.53 U11.54 U11.61 U11.62 U11.63 U11.65 U12.A9 U12.B1 U12.B3 U12.B9 U12.D1 U12.D8 U12.E1 U12.E2 U12.E8 U12.F9 U12.G1 U12.G8 U12.G9 U12.J2 U12.J8 U12.M1 U12.M9 U12.P1 U12.P9 U12.T1 U12.T9 U13.C4 U13.E7 U13.G5 U13.H10 U13.K8 U13.N2 U13.N5 U13.P4 U13.P6 U14.33 U15.4 Y4.2
  other v1: 2513.25,758 2796.75,758 2513.25,821 2796.75,821 2513.25,884 2796.75,884 2544.75,978.5 2765.25,978.5 1976.5,1064.02 2765.25,1073 2796.75,1073 1913.5,1095.51 1976.5,1095.51 2544.75,1104.5 1850.51,1127.01 1913.5,1127.01 2007.99,1127.01 2039.49,1127.01 2544.75,1136 2765.25,1136 1882.01,1158.5 1913.5,1158.5 1976.5,1158.5 2007.99,1158.5 2039.49,1158.5 2765.25,1167.5 1819.02,1221.5 1882.01,1221.5 1913.5,1221.5 2039.49,1221.5 2513.25,1230.5 2576.25,1230.5 2796.75,1230.5 1850.51,1252.99 1882.01,1252.99 1976.5,1252.99 1787.52,1284.49 1850.51,1284.49 1913.5,1284.49 2039.49,1284.49 2070.98,1284.49 1913.5,1315.98 2039.49,1315.98 2228.46,1473.46
  other v2: 1000,661.42 1039.37,661.42 1078.74,661.42 1118.11,661.42 1000,700.79 1039.37,700.79 1078.74,700.79 1118.11,700.79 1000,740.16 1039.37,740.16 1078.74,740.16 1118.11,740.16 1000,779.53 1039.37,779.53 1078.74,779.53 1118.11,779.53 1003.94,1303.15 1047.24,1303.15 1090.55,1303.15 1003.94,1346.46 1047.24,1346.46 1090.55,1346.46 1003.94,1389.76 1047.24,1389.76 1090.55,1389.76 2673.23,1543.31 2716.54,1543.31 2759.84,1543.31 2803.15,1543.31 2846.46,1543.31 2673.23,1586.61 2716.54,1586.61 2759.84,1586.61 2803.15,1586.61 2846.46,1586.61 2673.23,1629.92 2716.54,1629.92 2759.84,1629.92 2803.15,1629.92 2846.46,1629.92 2673.23,1673.23 2716.54,1673.23 2759.84,1673.23 2803.15,1673.23 2846.46,1673.23 2673.23,1716.54 2716.54,1716.54 2759.84,1716.54 2803.15,1716.54 2846.46,1716.54
DVI_+5V: P6.19 R146.1 R147.1 RT1.2
EHRPWM1A: P9.14 U5.U14
  other v1: 1787.52,1441.97
EHRPWM1B: P9.16 U5.T14
  other v1: 1787.52,1410.47
EHRPWM2A: P8.19 U5.U10
EHRPWM2B: P8.13 U5.T10
  other v1: 1913.5,1410.47
eMMC_RSTn: R111.2 R162.2 U13.K5
eMMC_VCCI: C125.1 U13.C2
ENZ_KALDO_1P8V: R54.2 U5.B4
ETH_TXD4: R145.1 U14.18
GND_EARTH: MTG1.1 MTG2.1 MTG3.1 MTG4.1 P3.5 P3.6 P4.6 P4.7 P4.8 P4.9 P5.13 P5.14 P6.20 P6.21 P6.22 P6.23 P10.11 P10.12 P10.13 P10.14 P10.15 P10.16 R136.2
GND_OSC0: C25.2 C26.2 U5.V11
GND_OSC1: C21.1 C22.1 U5.A5
GNDA_ADC: C31.2 C32.2 C33.2 C93.2 FB3.1 P9.34 U5.A9 U5.E8
GPIO0_7: P9.42 R50.2 R51.1
GPIO0_7SRC: R50.1 U5.C18
GPIO0_26: P8.14 U5.T11
  other v1: 1882.01,1410.47
GPIO0_27: P8.17 U5.U12
GPIO1_12: P8.12 U5.T12
  other v1: 1850.51,1410.47
GPIO1_13: P8.11 U5.R12
  other v1: 1850.51,1378.98
GPIO1_14: P8.16 U5.V13
GPIO1_15: P8.15 U5.U13
GPIO1_16: P9.15 R160.2 R161.2
GPIO1_17: P9.23 U5.V14
GPIO1_28: P9.12 U5.U18
GPIO1_29: P8.26 U5.V6
  other v1: 2070.98,1473.46
GPIO2_1: P8.18 U5.V12
GPIO3_18: R51.2 U5.B12
GPIO3_19: P9.27 U5.C13
  other v1: 1819.02,969.53
GPIO3_20: R20.2 U5.D13
  other v1: 1819.02,1001.02
GPIO3_21: P9.25 R167.2 U5.A14
GRN_C: P5.10 R132.2
GRNA: P5.9 U14.3
HDMI_1V8: C144.1 C145.1 C146.1 C147.1 C148.1 C149.1 C150.1 C151.1 FB5.1 U11.5 U11.14 U11.29 U11.35 U11.36 U11.41 U11.46 U11.47 U11.48 U11.55
HDMI_CEC: D8.1 P6.15 U11.30
HDMI_CEC_D: D8.2 R166.1
HDMI_DSCL: P6.17 R146.2 U11.33
HDMI_DSDA: P6.18 R147.2 U11.32
HDMI_HPD: P6.1 U11.31
HDMI_INT: R158.2 U5.U16 U11.50
  other v1: 1724.53,1441.97
HDMI_SWING: R148.1 U11.34
HDMI_TX0+: D6.2 P6.9 U11.40
HDMI_TX0-: D6.1 P6.11 U11.39
HDMI_TX1+: D7.5 P6.6 U11.43
HDMI_TX1-: D7.4 P6.8 U11.42
HDMI_TX2+: D7.2 P6.3 U11.45
HDMI_TX2-: D7.1 P6.5 U11.44
HDMI_TXC+: D6.4 P6.12 U11.38
HDMI_TXC-: D6.5 P6.14 U11.37
HDMICLK_DISn: U5.V17 Y4.1
I2C0_SCL: R3.1 U2.28 U5.C16 U7.1 U11.52
  other v1: 1724.53,969.53
I2C0_SDA: R4.1 U2.27 U5.C17 U7.3 U11.51
I2C1_SCL: P9.17 U5.A16
I2C1_SDA: P9.18 U5.B16
I2C2_SCL: P9.19 U5.D17
I2C2_SDA: P9.20 U5.D18
JTAG_EMU0: P2.13 R23.2 U5.C14
  other v1: 1787.52,969.53
JTAG_EMU1: P2.14 R24.2 U5.B14
JTAG_TCK: P2.9 P2.11 U5.A12
JTAG_TDI: P2.3 U5.B11
JTAG_TDO: P2.7 U5.A11
JTAG_TMS: P2.1 U5.C11
  other v1: 1882.01,969.53
JTAG_TRSTn: P2.2 R25.1 U5.B10
LCD_DATA0: P8.45 R70.2 R95.1 U5.R1 U11.15
LCD_DATA1: P8.46 R69.2 R94.1 U5.R2 U11.13
LCD_DATA2: P8.43 R68.2 R75.1 R93.1 U5.R3 U11.12
  other v1: 2165.47,1378.98
LCD_DATA3: P8.44 R67.2 R92.1 U5.R4 U11.11
  other v1: 2133.98,1378.98
LCD_DATA4: P8.41 R66.2 R91.1 U5.T1 U11.10
LCD_DATA5: P8.42 R65.2 R90.1 U5.T2 U11.7
LCD_DATA6: P8.39 R64.2 R89.1 U5.T3 U11.6
  other v1: 2165.47,1410.47
LCD_DATA7: P8.40 R63.2 R88.1 U5.T4 U11.3
  other v1: 2133.98,1410.47
LCD_DATA8: P8.37 R62.2 R87.1 U5.U1 U11.2
LCD_DATA9: P8.38 R61.2 R86.1 U5.U2 U11.1
LCD_DATA10: P8.36 R60.2 R85.1 U5.U3 U11.64
  other v1: 2165.47,1441.97
LCD_DATA11: P8.34 R59.2 R84.1 U5.U4 U11.60
  other v1: 2133.98,1441.97
LCD_DATA12: P8.35 R58.2 R83.1 U5.V2 U11.59
LCD_DATA13: P8.33 R57.2 R82.1 U5.V3 U11.58
  other v1: 2165.47,1473.46
LCD_DATA14: P8.31 R56.2 R81.1 U5.V4 U11.57
  other v1: 2133.98,1473.46
LCD_DATA15: P8.32 R55.2 R80.1 U5.T5 U11.56
  other v1: 2102.48,1410.47
LCD_DE: P8.30 R48.2 U11.20
LCD_HSYNC: P8.29 R47.2 U11.22
LCD_PCLK: P8.28 R45.2 U11.4
LCD_VSYNC: P8.27 R46.2 U11.21
LCDDE: R48.1 U5.R6
LCDPCLK: R45.1 U5.V5
LCDVHYNC: R47.1 U5.R5
  other v1: 2102.48,1378.98
LCDVSYNC: R46.1 U5.U5
LDO_PGOOD: U2.46 U5.B5
MDIO_CLK: U5.M18 U14.17
MDIO_DATA: R119.2 U5.M17 U14.16
MII1_COL: R138.1 U5.H16
  other v1: 1724.53,1127.01
MII1_CRS_DV: R139.1 U5.H17
  other v1: 1653.66,1127.01
MII1_REFCLK: R28.2 R124.1 R140.1
MII1_RXCLK: R131.1 U5.L18
MII1_RXD0: R128.1 U5.M16
  other v1: 1724.53,1284.49
MII1_RXD1: R127.1 U5.L15
  other v1: 1756.02,1252.99
MII1_RXD2: R126.1 U5.L16
  other v1: 1724.53,1252.99
MII1_RXD3: R125.1 U5.L17
MII1_RXDV: R129.1 U5.J17
MII1_RXERR: R133.1 U5.J15
  other v1: 1756.02,1158.5
MII1_TXCLK: R134.1 U5.K18
MII1_TXD0: U5.K17 U14.22
MII1_TXD1: U5.K16 U14.23
  other v1: 1724.53,1221.5
MII1_TXD2: U5.K15 U14.24
  other v1: 1756.02,1221.5
MII1_TXD3: U5.J18 U14.25
MII1_TXEN: U5.J16 U14.21
  other v1: 1724.53,1158.5
MMC0_CD: P2.19 P10.10 R157.1 U5.C15
  other v1: 1756.02,969.53
MMC0_CLKO: P10.5 R152.2 U5.G17
MMC0_CMD: P10.3 R151.2 U5.G18
MMC0_DAT0: P10.7 R153.2 U5.G16
  other v1: 1724.53,1095.51
MMC0_DAT1: P10.8 R154.2 U5.G15
  other v1: 1756.02,1095.51
MMC0_DAT2: P10.1 R150.2 U5.F18
MMC0_DAT3: P10.2 R155.2 U5.F17
MMC1_CLK: P8.21 R110.2 U5.U9 U13.M6
MMC1_CMD: P8.20 R109.2 U5.V9 U13.M5
MMC1_DAT0: P8.25 R101.2 U5.U7 U13.A3
MMC1_DAT1: P8.24 R102.2 U5.V7 U13.A4
MMC1_DAT2: P8.5 R103.2 U5.R8 U13.A5
  other v1: 2007.99,1378.98
MMC1_DAT3: P8.6 R104.2 U5.T8 U13.B2
  other v1: 2007.99,1410.47
MMC1_DAT4: P8.23 R105.2 U5.U8 U13.B3
MMC1_DAT5: P8.22 R106.2 U5.V8 U13.B4
MMC1_DAT6: P8.3 R107.2 U5.R9 U13.B5
MMC1_DAT7: P8.4 R108.2 U5.T9 U13.B6
  other v1: 1976.5,1410.47
MODE2: R113.1 R138.2 U14.15
NetC19_1: C19.1 R10.2 R11.1 U4.4
NetC155_1: C155.1 U15.1
NetR21_1: R21.1 U6.5
NetR75_2: R75.2 S2.1 S2.3
NetR149_1: R149.1 U11.49
NetR159_2: R159.2 U5.P15
  other v1: 1756.02,1347.48
NetR162_1: R162.1
NetR167_1: R167.1 Y4.3
NetTP5_1: TP5.1 U2.4 U2.5
NetTP6_1: TP6.1 U2.6
NetTP7_1: TP7.1 U2.11
NetU3_2: U5.R14
  other v1: 1787.52,1378.98
OSC0_IN: C25.1 R17.1 U5.V10 Y2.2
OSC0_OUT: C26.1 R17.2 U5.U11 Y2.1
OSC1_IN: C21.2 U5.A6 Y1.1
OSC1_OUT: C22.2 U5.A4 Y1.4
P_BYPASS: C4.1 U2.47
P_INT_LDO: C3.1 U2.48
P_L1: L1.1 U2.20
P_L2: L2.1 U2.23
P_L3: L3.1 U2.31
PHY_VDDCR: C134.1 C136.1 U14.6
PHY_XTAL1: C143.1 R141.2 R142.1 Y3.1
PHY_XTAL2: R141.1 R143.1 U14.4
PHYX: C142.1 R143.2 Y3.2
PMIC_INT: R1.1 U2.45 U5.B18
PMIC_PGOOD: U2.26 U5.B15
PMIC_POWR_EN: U2.9 U5.C6
  other v1: 2070.98,969.53
PROC_A15: R18.1 U5.A15
PWR_BUT: P9.9 S3.2 S3.4 U2.25
PWR_LEDR: D1.1 R12.1
RBIAS: R144.1 U14.32
RCLKIN: R140.2 R142.2 U14.5
REFCLKO: R118.1 R124.2 R131.2 U14.7
RXD0/MODE0: R112.1 R128.2 U14.11
RXD1/MODE1: R114.1 R127.2 U14.10
RXD2/RMIISEL: R117.1 R126.2 U14.9
RXD3/PHYAD2: R116.1 R125.2 U14.8
RXDV: R129.2 U14.26
RXER/PHYAD0: R115.1 R133.2 U14.13
RXN: C138.1 P5.2 R121.1 U14.30
RXP: C137.1 P5.1 R120.1 U14.31
SPI1_CS0: P9.28 U5.C12 U11.25
  other v1: 1850.51,969.53
SPI1_D0: P9.29 U5.B13 U11.24
SPI1_D1: P9.30 U5.D12
  other v1: 1850.51,1001.02
SPI1_SCLK: P9.31 U5.A13 U11.23
SYS_5V: C7.1 C8.1 C10.1 C13.1 C17.1 P9.7 P9.8 RT1.1 U2.2 U2.7 U2.8 U2.21 U2.22 U2.32 U2.39 U2.42 U4.2
SYS_RESETn: C24.1 C30.1 P2.15 P9.10 R14.2 S1.2 S1.4 U5.A10 U14.19
TCT_RCT: C141.1 P5.4 P5.5 R137.1
TESTOUT: TP3.1 U5.A3
TIMER4: P8.7 U5.R7
  other v1: 2039.49,1378.98
TIMER5: P8.9 U5.T6
  other v1: 2070.98,1410.47
TIMER6: P8.10 U5.U6
  other v1: 2070.98,1441.97
TIMER7: P8.8 U5.T7
  other v1: 2039.49,1410.47
TXCLK: R134.2 U14.20
TXN: C140.1 P5.6 R123.1 U14.28
TXP: C139.1 P5.3 R122.1 U14.29
U5_H18: R28.1 U5.H18
U5_R13: R160.1 U5.R13
  other v1: 1819.02,1378.98
U5_T13: R161.1 U5.T13
  other v1: 1819.02,1410.47
UART0_RX: U5.E15 U15.6
  other v1: 1756.02,1032.52
UART0_TX: U5.E16 U15.5
  other v1: 1724.53,1032.52
UART1_RXD: P9.26 U5.D16
  other v1: 1724.53,1001.02
UART1_TXD: P9.24 U5.D15
  other v1: 1756.02,1001.02
UART2_RXD: P9.22 U5.A17
UART2_TXD: P9.21 U5.B17
UART4_RXD: P9.11 U5.T17
UART4_TXD: P9.13 U5.U17
USB0_DM: P4.2 U5.N18 U10.2
USB0_DP: P4.3 U5.N17 U10.1
USB0_ID: P4.4 U5.P16 U10.3
  other v1: 1724.53,1347.48
USB1_DM: P3.2 U5.R18 U9.2
USB1_DP: P3.3 U5.R17 U9.1
USB1_DRVVBUS: R53.1 U5.F15
  other v1: 1756.02,1064.02
USB1_ID: R49.2 U5.P17
USB1_OCn: R52.2 U5.T16
  other v1: 1724.53,1410.47
USB1_PWR: C35.1 FB7.1 FB8.2 U9.6
USB1_VBUS: FB8.1 U5.T18
USB_DC: C1.1 C36.1 P4.1 R159.1 U2.12
USR0: U5.V15
USR1: U5.U15
  other v1: 1756.02,1441.97
USR2: U5.T15
  other v1: 1756.02,1410.47
USR3: U5.V16
VBUS: FB7.2 P3.1
VDCDC1: L1.2 R6.1 U2.19
VDCDC2: C12.2 C62.2 C63.1 C64.1 C65.1 L2.2 U2.24 U5.F10 U5.F11 U5.F12 U5.F13 U5.G13 U5.H13 U5.J13
  other v1: 1850.51,1064.02 1913.5,1064.02 1850.51,1095.51 1819.02,1158.5
VDCDC3: C11.2 C39.2 C40.2 C41.1 C42.1 C43.1 C44.1 C45.1 C46.1 C47.1 C48.1 C49.1 C50.1 C51.1 C52.1 C53.1 C54.1 C55.2 L3.2 U2.29 U5.F6 U5.F7 U5.G6 U5.G7 U5.G10 U5.H11 U5.J12 U5.K6 U5.K8 U5.K12 U5.L6 U5.L7 U5.L8 U5.L9 U5.M11 U5.M13 U5.N8 U5.N9 U5.N12 U5.N13
  other v1: 2039.49,1095.51 2070.98,1095.51 1882.01,1127.01 1850.51,1221.5 1976.5,1221.5 2007.99,1221.5 2070.98,1221.5 1913.5,1252.99 2007.99,1252.99 2039.49,1252.99 1819.02,1284.49 1850.51,1315.98
VDD_1V8: C14.2 C78.1 C86.1 C88.1 FB1.1 FB2.2 FB5.2 R9.1 U2.40 U5.D10 U5.E9 U5.N16 U5.R16
  other v1: 1913.5,1001.02 1976.5,1032.52 1724.53,1315.98
VDD_3V3A: C15.2 C27.1 C37.1 C38.1 C56.2 C57.2 C58.1 C59.1 C60.2 C61.2 C66.1 C67.1 C68.2 C69.2 C70.2 C71.2 C72.2 C73.2 C74.2 C75.2 C76.2 C77.1 C87.1 C152.1 C158.2 C159.1 R1.2 R3.2 R4.2 R14.1 R52.1 R55.1 R56.1 R57.1 R58.1 R59.1 R60.1 R61.1 R62.1 R63.1 R64.1 R65.1 R66.1 R67.1 R68.1 R69.1 R70.1 R156.1 U2.43 U5.E10 U5.E11 U5.E12 U5.E13 U5.F14 U5.G14 U5.H14 U5.J14 U5.K14 U5.L14 U5.N5 U5.N15 U5.P5 U5.P6 U5.P7 U5.P8 U5.P10 U5.P11 U5.P12 U5.P13 U5.R15 U6.6 U6.7 U6.8 U7.4 Y4.4
  other v1: 1819.02,1032.52 1850.51,1032.52 1913.5,1032.52 1787.52,1095.51 1787.52,1158.5 1787.52,1221.5 2102.48,1284.49 1756.02,1315.98 1976.5,1315.98 1819.02,1347.48 1850.51,1347.48 1882.01,1347.48 1976.5,1347.48 2007.99,1347.48 2039.49,1347.48 2102.48,1347.48 1756.02,1378.98
VDD_3V3AUX: C18.2 D1.2 U2.1 U4.1
VDD_3V3B: C20.1 C29.1 C126.2 C127.1 C128.1 C129.1 C130.1 C135.1 C153.1 C154.1 C155.2 FB4.1 P2.5 P9.3 P9.32 P10.4 R11.2 R23.1 R24.1 R101.1 R102.1 R103.1 R104.1 R105.1 R106.1 R107.1 R108.1 R109.1 R110.1 R111.1 R112.2 R113.2 R114.2 R119.1 R150.1 R151.1 R152.1 R153.1 R154.1 R155.1 R157.2 R158.1 R163.1 R166.2 U4.3 U13.C6 U13.E6 U13.F5 U13.J10 U13.K9 U13.M4 U13.N4 U13.P3 U13.P5 U14.12 U15.7 U15.8
VDD_5V: C2.1 P1.1 P9.5 P9.6 U2.10
VDD_ADC: C93.1 FB2.1 P9.4 R27.2 U5.D8
  other v1: 1976.5,1001.02 2007.99,1032.52
VDD_MPUON: TP2.1 U5.A2
VDD_PHYA: C131.1 C132.1 C133.2 FB4.2 R120.2 R121.2 R122.2 R123.2 R137.2 U14.1 U14.27
VDD_PLL: C79.1 C92.1 C94.1 C106.1 FB1.2 U5.E7 U5.H15 U5.R10 U5.R11
  other v1: 2039.49,1032.52 1756.02,1127.01 1882.01,1378.98 1913.5,1378.98
VDD_RTC: C104.1 U5.D6
  other v1: 2070.98,1001.02
VDDS: C80.1 C81.1 C82.1 C83.1 C84.1 C85.1 R8.2 R9.2 U5.E6 U5.E14 U5.F9 U5.K13 U5.N6 U5.P9 U5.P14
  other v1: 1787.52,1032.52 2070.98,1032.52
VDDS_DDR: C9.2 C95.2 C96.2 C97.1 C98.1 C99.1 C100.1 C101.1 C102.1 C103.1 C107.1 C108.1 C109.1 C110.1 C111.1 C112.1 C113.1 C114.1 C115.1 C116.1 C117.1 C118.2 C119.1 C120.1 C121.1 C122.2 R6.2 R97.1 R98.1 U5.E5 U5.F5 U5.G5 U5.H5 U5.J5 U5.K5 U5.L5 U12.A1 U12.A8 U12.B2 U12.C1 U12.C9 U12.D2 U12.D9 U12.E9 U12.F1 U12.G7 U12.H2 U12.H9 U12.K2 U12.K8 U12.N1 U12.N9 U12.R1 U12.R9
  other v1: 2513.25,789.5 2796.75,789.5 2513.25,852.5 2796.75,852.5 2544.75,947 2765.25,947 2102.48,1032.52 2544.75,1041.5 2796.75,1041.5 2733.75,1073 2102.48,1095.51 2513.25,1104.5 2576.25,1136 2796.75,1136 2070.98,1158.5 2796.75,1167.5 2513.25,1199 2796.75,1199 2102.48,1221.5 2544.75,1230.5 2513.25,1262 2765.25,1262
VIO: R7.2 U2.18
VLDO1: R5.1 R7.1 R8.1 U2.3
VREFP_ADC: C31.1 C32.1 C33.1 R27.1 U5.B9
VRTC: C16.2 C105.1 R5.2 R26.1 U5.D7
  other v1: 2039.49,1001.02
WAKEUP: R26.2 U2.13 U5.C5
  other v1: 2102.48,969.53
WP: R156.2 TP4.1 U7.5
XDMA_EVENT_INTR0: P2.17 R18.2 U6.1
YEL_C: P5.11 R130.2
YELA: P5.12 R135.1 U14.2
ZQ: R99.2 U12.L8
  other v1: 2765.25,915.5
pads on no net: "P5. " C156.1 C156.2 C157.1 C157.2 C160.1 C160.2 C161.1 C161.2 C162.1 C162.2 C163.1 C163.2 C164.1 C164.2 C165.1 C165.2 C166.1 C166.2 C167.1 C167.2 C168.1 C168.2 C169.1 C169.2 C170.1 C170.2 C171.1 C171.2 C172.1 C172.2 C173.1 C173.2 D6.6 D6.7 D6.9 D6.10 D7.6 D7.7 D7.9 D7.10 J1.2 J1.3 J1.6 P1.2 P1.3 P2.6 P5.7 P6.2 R97.2 RT1.3 RT1.4 RT1.5 RT1.6 U2.14 U2.15 U2.16 U2.17 U2.33 U2.34 U2.35 U2.36 U2.37 U2.38 U2.44 U5.E17 U5.E18 U5.F16 U5.M5 U5.M15 U5.P18 U9.3 U9.5 U10.5 U10.6 U11.26 U11.28 U12.A2 U12.A3 U12.A7 U12.B8 U12.C2 U12.C3 U12.C8 U12.D7 U12.E3 U12.F2 U12.F7 U12.F8 U12.G2 U12.H3 U12.H7 U12.H8 U12.J1 U12.J9 U12.K1 U12.L1 U12.L7 U12.L9 U12.M2 U12.M3 U12.M7 U12.N2 U12.N3 U12.N7 U12.N8 U12.P2 U12.P3 U12.P7 U12.P8 U12.R2 U12.R3 U12.R7 U12.R8 U12.T2 U12.T3 U12.T7 U12.T8 U13.A1 U13.A2 U13.A6 U13.A7 U13.A8 U13.A9 U13.A10 U13.A11 U13.A12 U13.A13 U13.A14 U13.B1 U13.B7 U13.B8 U13.B9 U13.B10 U13.B11 U13.B12 U13.B13 U13.B14 U13.C1 U13.C3 U13.C5 U13.C7 U13.C8 U13.C9 U13.C10 U13.C11 U13.C12 U13.C13 U13.C14 U13.D1 U13.D2 U13.D3 U13.D4 U13.D12 U13.D13 U13.D14 U13.E1 U13.E2 U13.E3 U13.E5 U13.E8 U13.E9 U13.E10 U13.E12 U13.E13 U13.E14 U13.F1 U13.F2 U13.F3 U13.F10 U13.F12 U13.F13 U13.F14 U13.G1 U13.G2 U13.G3 U13.G10 U13.G12 U13.G13 U13.G14 U13.H1 U13.H2 U13.H3 U13.H5 U13.H12 U13.H13 U13.H14 U13.J1 U13.J2 U13.J3 U13.J5 U13.J12 U13.J13 U13.J14 U13.K1 U13.K2 U13.K3 U13.K6 U13.K7 U13.K10 U13.K12 U13.K13 U13.K14 U13.L1 U13.L2 U13.L3 U13.L12 U13.L13 U13.L14 U13.M1 U13.M2 U13.M3 U13.M7 U13.M8 U13.M9 U13.M10 U13.M11 U13.M12 U13.M13 U13.M14 U13.N1 U13.N3 U13.N6 U13.N7 U13.N8 U13.N9 U13.N10 U13.N11 U13.N12 U13.N13 U13.N14 U13.P1 U13.P2 U13.P7 U13.P8 U13.P9 U13.P10 U13.P11 U13.P12 U13.P13 U13.P14 Y1.2 Y1.3
copper on no net:
  other v1: 2544.75,758 2576.25,758 2733.75,758 2765.25,758 2544.75,789.5 2576.25,789.5 2733.75,789.5 2765.25,789.5 2544.75,821 2576.25,821 2733.75,821 2765.25,821 2544.75,852.5 2576.25,852.5 2733.75,852.5 2765.25,852.5 2544.75,884 2576.25,884 2733.75,915.5 2513.25,947 2733.75,1041.5 2765.25,1041.5 1724.53,1064.02 2228.46,1095.51 2733.75,1104.5 2765.25,1104.5 1976.5,1127.01 2165.47,1127.01 2607.75,1136 1945,1190 2544.75,1199 2765.25,1199 2765.25,1230.5 2544.75,1262 2733.75,1262 1756.02,1284.49 2196.97,1284.49 2165.47,1315.98 1787.52,1347.48 2070.98,1347.48 1976.5,1378.98 2070.98,1378.98

## Polygon pours and split planes (outlines as drawn)
no net on Layer 1 (split plane): 3579.9,20.1 20.1,20.1 20.1,2379.9 3579.9,2379.9
no net on Layer 2 (split plane): 3579.9,20.1 20.1,20.1 20.1,2379.9 3579.9,2379.9